# EAGLE board Project Canary V4.0 (EAGLE 8.4.1)
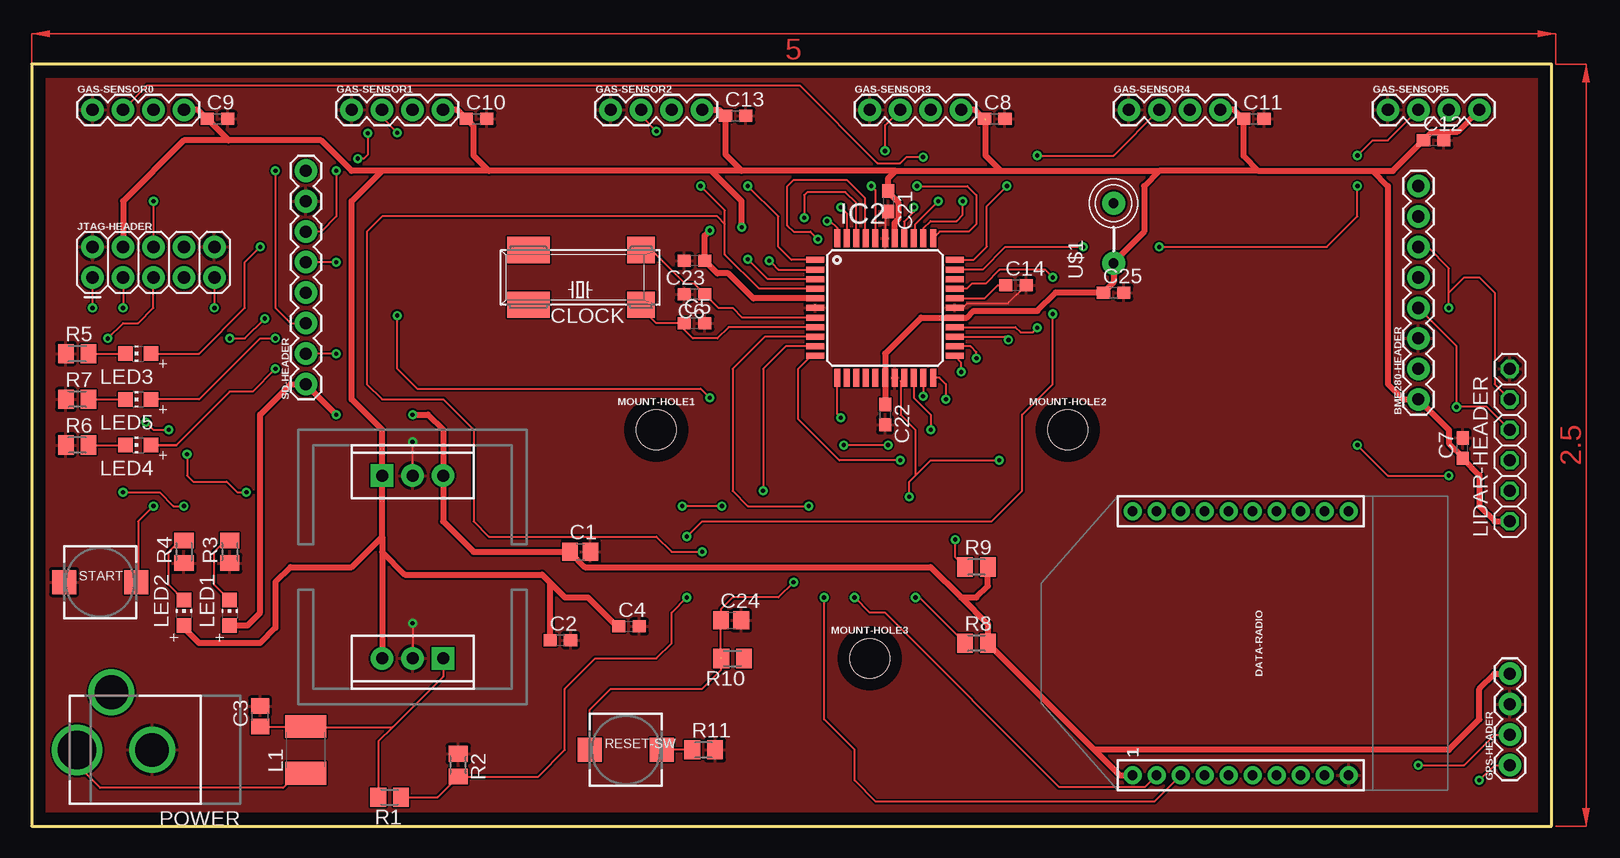
[diagram p0: board, top side]
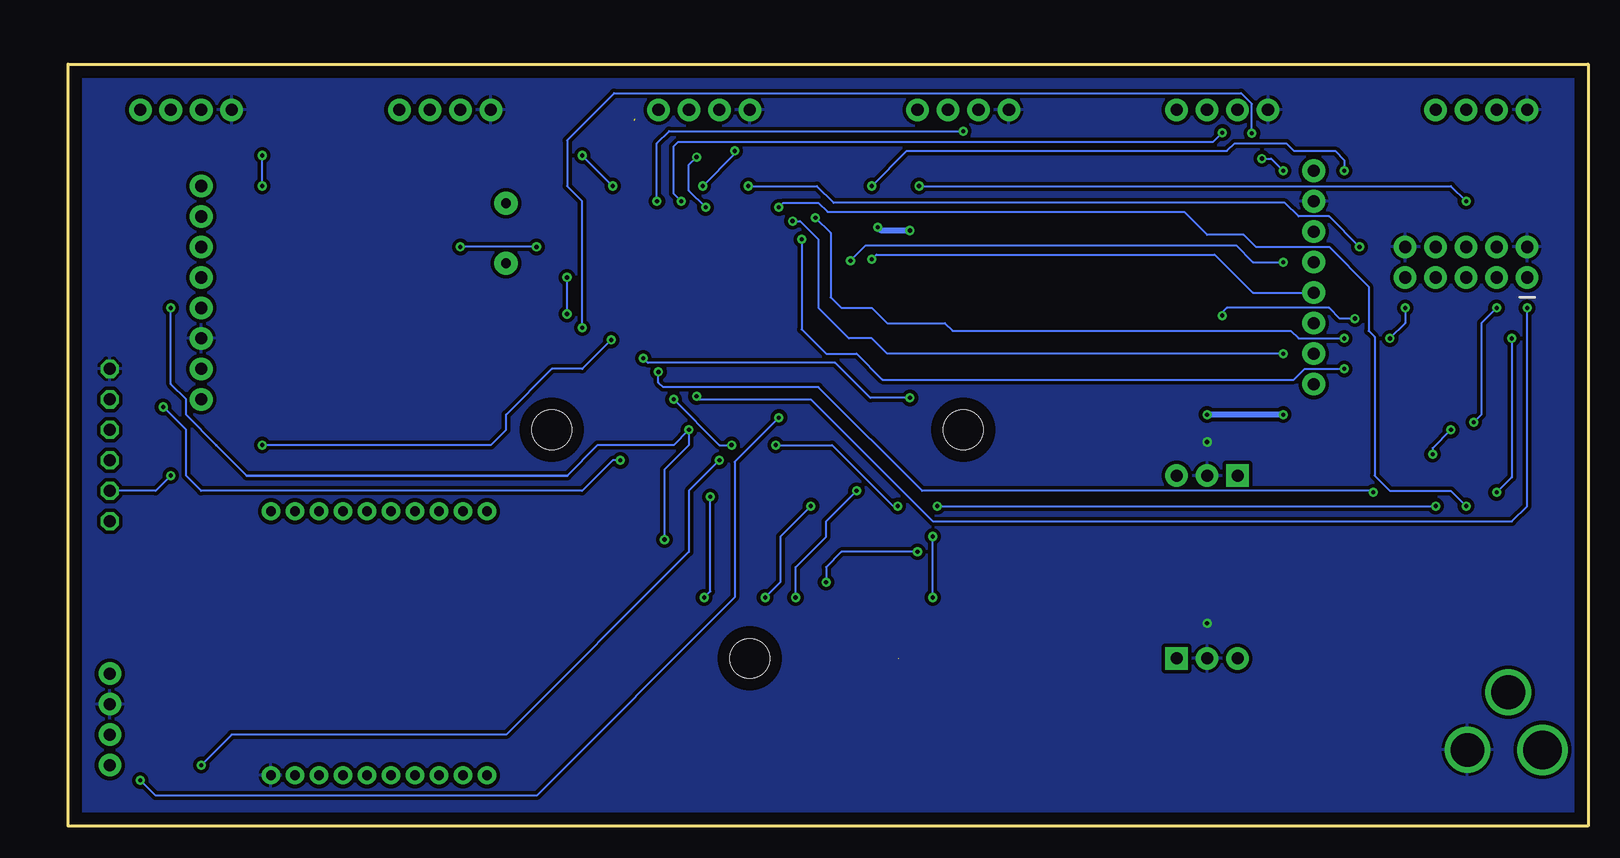
[diagram p1: board, bottom side, seen from below]

Size 126.67 x 63.49 mm. Coordinates in mm from the lower left corner, seen from the top.
Outline: 0,0 126.67,0 126.67,63.49 0,63.49 0,0
Copper layers (1*16): Top 0.035mm / dielectric 1.5mm / Bottom 0.035mm
Design rules "default": minimum track width 6mil, minimum drill 0.35mm, track to track 6mil, track to pad 6mil, pad to pad 6mil, via to via 6mil, smd to smd 6mil, copper to edge 40mil, drill to drill 6mil, minimum pad ring 10mil, minimum via ring 8mil, stop-mask expansion 4mil, vias tented up to drill 0mil, thermal gap 10mil
Net classes: 0 5V: width 0.508 mm; 1 3.3V: width 0.508 mm

## Footprints (pad centres in the part's own frame; a part is rotated, then mirrored left to right if it is on the bottom)
1X08 = drill 1.016 pad 1.88: 1 0,0; 2 2.54,0; 3 5.08,0; 4 7.62,0; 5 10.16,0; 6 12.7,0; 7 15.24,0; 8 17.78,0
C0805 = smd 1.3 x 1.5: 1 -0.85,0; 2 0.85,0
C0603 = smd 1.1 x 1: 1 -0.85,0; 2 0.85,0
86SMX = smd 2.286 x 2.184: 1 -5.08,-2.286; 4 -5.08,2.286 | smd 3.556 x 2.184: 2 4.318,-2.286; 3 4.318,2.286
XBEE = drill 0.8 pad 1.524: 1 -11,20; 2 -11,18; 3 -11,16; 4 -11,14; 5 -11,12; 6 -11,10; 7 -11,8; 8 -11,6; 9 -11,4; 10 -11,2; 11 11,2; 12 11,4; 13 11,6; 14 11,8; 15 11,10; 16 11,12; 17 11,14; 18 11,16; 19 11,18; 20 11,20
1X04 = drill 1.016 pad 1.88: 1 0,0; 2 2.54,0; 3 5.08,0; 4 7.62,0
TQFP44 = smd 1.5 x 0.5: 1 -5.8,4; 2 -5.8,3.2; 3 -5.8,2.4; 4 -5.8,1.6; 5 -5.8,0.8; 6 -5.8,0; 7 -5.8,-0.8; 8 -5.8,-1.6; 9 -5.8,-2.4; 10 -5.8,-3.2; 11 -5.8,-4; 23 5.8,-4; 24 5.8,-3.2; 25 5.8,-2.4; 26 5.8,-1.6; 27 5.8,-0.8; 28 5.8,0; 29 5.8,0.8; 30 5.8,1.6; 31 5.8,2.4; 32 5.8,3.2; 33 5.8,4 | smd 0.5 x 1.5: 12 -4,-5.8; 13 -3.2,-5.8; 14 -2.4,-5.8; 15 -1.6,-5.8; 16 -0.8,-5.8; 17 0,-5.8; 18 0.8,-5.8; 19 1.6,-5.8; 20 2.4,-5.8; 21 3.2,-5.8; 22 4,-5.8; 34 4,5.8; 35 3.2,5.8; 36 2.4,5.8; 37 1.6,5.8; 38 0.8,5.8; 39 0,5.8; 40 -0.8,5.8; 41 -1.6,5.8; 42 -2.4,5.8; 43 -3.2,5.8; 44 -4,5.8
2X5 = drill 1.016 pad 1.88: 1 0,0; 2 0,2.54; 3 2.54,0; 4 2.54,2.54; 5 5.08,0; 6 5.08,2.54; 7 7.62,0; 8 7.62,2.54; 9 10.16,0; 10 10.16,2.54
L1812 = smd 1.9 x 3.4: 1 -1.95,0; 2 1.95,0
CHIP-LED0805 = smd 1.2 x 1.2: A 0,-1.05; C 0,1.05
1X06 = drill 1.016 octagon: 1 -6.35,0; 2 -3.81,0; 3 -1.27,0; 4 1.27,0; 5 3.81,0; 6 6.35,0
STAND-OFF = hole 3.302: 0,0
DCJACK_2MM_PTH = drill 2.8: GND 0,7.35; GNDBREAK 4.8,10.75 | drill 3.2: PWR 0,13.6
M0805 = smd 1.3 x 1.6: 1 -0.95,0; 2 0.95,0
TO220-IGO = drill 1 pad 1.88: GND 0,0; OUT 2.54,0 | drill 1 pad 1.88 square: IN -2.54,0
PUSHBUTTON_SMD_SJ = smd 2 x 2: P$1 3,0; P$2 -3,0
FB = drill 0.8 pad 1.93: P$1 -2.5,0; P$2 2.5,0

## Placement (x,y rotation side)
BME280-HEADER  [1X08]  115.57,35.56 90 top
C1  1uF  [C0805]  45.72,22.86 0 top
C2  22uF  [C0603]  44.07,15.49 0 top
C3  10uF  [C0805]  19.05,9.14 90 top
C4  10uF  [C0603]  49.78,16.64 0 top
C5  22pF  [C0603]  55.24,41.91 0 top
C6  22pF  [C0603]  55.24,44.32 180 top
C7  680uF  [C0603]  119.25,31.5 90 top
C8  0.1uF  [C0603]  80.26,58.93 0 top
C9  0.1uF  [C0603]  15.49,58.93 0 top
C10  0.1uF  [C0603]  37.08,58.93 0 top
C11  0.1uF  [C0603]  101.85,58.93 0 top
C12  0.1uF  [C0603]  116.84,57.15 0 top
C13  0.1uF  [C0603]  58.67,59.18 0 top
C14  0.1uF  [C0603]  82.04,45.09 0 top
C21  100nF  [C0603]  71.37,52.07 270 top
C22  100nF  [C0603]  71.12,34.29 270 top
C23  100nF  [C0603]  55.24,47.12 180 top
C24  100nF  [C0805]  58.29,17.14 0 top
C25  0.1uF  [C0603]  90.17,44.45 0 top
CLOCK  20MHz  [86SMX]  45.72,45.72 180 top
DATA-RADIO  [XBEE]  111.76,15.24 90 top
GAS-SENSOR0  [1X04]  5.08,59.69 0 top
GAS-SENSOR1  [1X04]  26.67,59.69 0 top
GAS-SENSOR2  [1X04]  48.26,59.69 0 top
GAS-SENSOR3  [1X04]  69.85,59.69 0 top
GAS-SENSOR4  [1X04]  91.44,59.69 0 top
GAS-SENSOR5  [1X04]  113.03,59.69 0 top
GPS-HEADER  [1X04]  123.19,5.08 90 top
IC2  ATMEGA324PA  [TQFP44]  71.12,43.18 0 top
JTAG-HEADER  [2X5]  5.08,45.72 0 top
L1  10uH  [L1812]  22.86,6.35 90 top
LED1  [CHIP-LED0805]  16.51,17.78 0 top
LED2  [CHIP-LED0805]  12.7,17.78 0 top
LED3  RED  [CHIP-LED0805]  8.89,39.37 90 top
LED4  GREEN  [CHIP-LED0805]  8.89,31.75 90 top
LED5  BLUE  [CHIP-LED0805]  8.89,35.56 90 top
LIDAR-HEADER  [1X06]  123.19,31.75 90 top
MOUNT-HOLE1  STAND-OFF  [STAND-OFF]  52.07,33.02 0 top
MOUNT-HOLE2  STAND-OFF  [STAND-OFF]  86.36,33.02 0 top
MOUNT-HOLE3  STAND-OFF  [STAND-OFF]  69.85,13.97 0 top
POWER  15.5V  [DCJACK_2MM_PTH]  17.4,6.35 90 top
R1  400k +/-1%  [M0805]  29.84,2.41 180 top
R2  100k +/- 1%  [M0805]  35.56,5.08 270 top
R3  1k  [M0805]  16.51,22.86 90 top
R4  1k  [M0805]  12.7,22.86 90 top
R5  1k  [M0805]  3.81,39.37 0 top
R6  1k  [M0805]  3.81,31.75 0 top
R7  1k  [M0805]  3.81,35.56 0 top
R8  4.7k  [M0805]  78.74,15.24 0 top
R9  4.7k  [M0805]  78.74,21.59 0 top
R10  4.7K  [M0805]  58.42,13.97 180 top
R11  330  [M0805]  56.01,6.35 0 top
REGULATOR  3.3V  [TO220-IGO]  31.75,29.21 0 top
RESET-SW  [PUSHBUTTON_SMD_SJ]  49.53,6.35 0 top
SD-HEADER  [1X08]  22.86,36.83 90 top
START  [PUSHBUTTON_SMD_SJ]  5.71,20.32 0 top
SWITCHING-REGULATOR  5V  [TO220-IGO]  31.75,13.97 180 top
U$1  FB  [FB]  90.17,49.4 90 top

## Library data of the parts
BME280-HEADER SD-HEADER = SparkFun-Connectors; PROD_ID: CONN-08438
C1-C14 C21-C25 LED1-LED5 LIDAR-HEADER POWER R1-R11 RESET-SW START U$1 = adafruit
CLOCK = adafruit; OC_FARNELL: 6344860; OC_NEWARK: unknown
DATA-RADIO = SparkFun-RF
GAS-SENSOR0 GAS-SENSOR1-GAS-SENSOR5 GPS-HEADER = SparkFun-Connectors; PROD_ID: CONN-09696
IC2 = atmel; MPN: ATMEGA644PV-10AU; OC_FARNELL: 1455123; OC_NEWARK: 58M3748
JTAG-HEADER = SparkFun-Connectors; PROD_ID: CONN-08499; SF_ID: PRT-0778
L1 = eagle-ltspice; SPICEMODEL: NONE; SPICEPREFIX: L
MOUNT-HOLE1-MOUNT-HOLE3 = SparkFun-Hardware
REGULATOR SWITCHING-REGULATOR = SparkFun-IC-Power

## Nets
3.3V: C1.1 DATA-RADIO.1 GPS-HEADER.4 LED1.A R8.2 R9.2 REGULATOR.OUT SD-HEADER.1
5V: BME280-HEADER.1 C2.1 C4.1 C7.1 C8.1 C9.1 C10.1 C11.1 C12.1 C13.1 C21.1 C22.1 C23.1 C25.1 GAS-SENSOR0.4 GAS-SENSOR1.4 GAS-SENSOR2.4 GAS-SENSOR3.4 GAS-SENSOR4.4 GAS-SENSOR5.4 IC2.5 IC2.17 IC2.27 IC2.38 JTAG-HEADER.4 LED2.A LIDAR-HEADER.1 REGULATOR.IN SWITCHING-REGULATOR.OUT U$1.P$1
GND: BME280-HEADER.3 C1.2 C2.2 C3.2 C4.2 C5.2 C6.2 C7.2 C8.2 C9.2 C10.2 C11.2 C12.2 C13.2 C14.2 C21.2 C22.2 C23.2 C24.2 C25.2 DATA-RADIO.10 GAS-SENSOR0.1 GAS-SENSOR1.1 GAS-SENSOR2.1 GAS-SENSOR3.1 GAS-SENSOR4.1 GAS-SENSOR5.1 GPS-HEADER.3 IC2.6 IC2.18 IC2.28 IC2.39 JTAG-HEADER.2 JTAG-HEADER.10 LIDAR-HEADER.6 POWER.GND R2.1 R3.1 R4.1 R5.1 R6.1 R7.1 R11.2 REGULATOR.GND SD-HEADER.7 START.P$2 SWITCHING-REGULATOR.GND
GNDBREAK: POWER.GNDBREAK
N$1: C3.1 L1.2 R1.2 SWITCHING-REGULATOR.IN
N$2: LED1.C R3.2
N$3: LED2.C R4.2
N$4: LED3.C R5.2
N$5: LED4.C R6.2
N$6: LED5.C R7.2
N$7: IC2.43 START.P$1
N$8: C6.1 CLOCK.1 IC2.7
N$9: U$1.P$2
N$10: GPS-HEADER.1 IC2.12
N$11: GPS-HEADER.2 IC2.11
N$12: GAS-SENSOR0.2 IC2.37
N$13: IC2.25 LIDAR-HEADER.2
N$14: IC2.24 JTAG-HEADER.9
N$15: C14.1 IC2.29
N$16: GAS-SENSOR1.2 IC2.36
N$17: GAS-SENSOR2.2 IC2.35
N$18: GAS-SENSOR3.2 IC2.34
N$19: GAS-SENSOR4.2 IC2.33
N$20: GAS-SENSOR5.2 IC2.32
N$21: BME280-HEADER.4 IC2.19 LIDAR-HEADER.4 R8.1
N$22: L1.1 POWER.PWR
N$23: IC2.23 JTAG-HEADER.3
N$24: BME280-HEADER.6 IC2.20 LIDAR-HEADER.5 R9.1
N$25: IC2.22 JTAG-HEADER.5
N$26: DATA-RADIO.3 IC2.10
N$27: DATA-RADIO.2 IC2.9
N$28: IC2.21 JTAG-HEADER.1
N$30: R11.1 RESET-SW.P$1
N$31: R10.1
N$32: C5.1 CLOCK.4 IC2.8
RESET: C24.1 IC2.4 JTAG-HEADER.6 R10.2 RESET-SW.P$2
SD-CD: IC2.26 SD-HEADER.6
SD-CS: IC2.44 SD-HEADER.2
SD-DI: IC2.1 SD-HEADER.3
SD-DO: IC2.2 SD-HEADER.5
SD-SCK: IC2.3 SD-HEADER.4
STATUS-B: IC2.42 LED5.A
STATUS-G: IC2.41 LED4.A
STATUS-R: IC2.40 LED3.A
VOLTMETER: IC2.30 R1.1 R2.2

## Tracks (layer width: path | path; a pad name or v marks a point on that pad's centre or on a via)
3.3V  (via drill 0.35)
  Top 0.152: DATA-RADIO.1 91.87,4.24 | C1.1 44.87,22.82 | 88.65,6.35 88.61,6.32
  Top 0.508: LED1.A 18,16.73 19.05,17.78 19.05,34.29 21.59,36.83 SD-HEADER.1 v25.4,34.29 | v31.75,34.29 33.02,34.29 34.29,33.02 REGULATOR.OUT 34.29,25.4 36.83,22.86 C1.1 | 77.47,19.05 74.93,21.59 46.1,21.59 44.87,22.82 | 77.47,19.05 78.74,19.05 79.69,20 R9.2 | 77.47,19.05 79.69,16.83 R8.2 88.61,6.32 90.69,4.24 DATA-RADIO.1 | GPS-HEADER.4 121.92,12.7 120.65,11.43 120.65,8.89 118.11,6.35 88.65,6.35
  Bottom 0.508: v25.4,34.29 v31.75,34.29
5V  (via drill 0.35)  (1 unrouted)
  Top 0.152: C9.1 14.61,58.93 | 43.18,15.53 C2.1 | 119.25,30.73 C7.1 | 71.37,52.83 C21.1
  Top 0.508: 38.1,54.61 29.21,54.61 | 56.64,54.61 38.1,54.61 | 59.18,54.61 56.64,54.61 | 29.21,54.61 26.67,54.61 24.13,57.15 16.42,57.15 | 16.42,57.15 12.7,57.15 7.62,52.07 JTAG-HEADER.4 | LIDAR-HEADER.1 121.92,25.4 120.65,26.67 120.65,29.25 C7.1 | LED2.A 12.7,16.51 13.97,15.24 19.05,15.24 20.32,16.51 20.32,20.32 21.59,21.59 26.67,21.59 29.21,24.13 | 43.18,20.32 44.45,19.05 46.35,19.05 48.77,16.64 C4.1 | 72.01,54.61 59.18,54.61 | 72.01,54.61 80.77,54.61 | 80.77,54.61 93.98,54.61 | 102.23,54.61 93.98,54.61 | 102.23,54.61 111.76,54.61 | 111.76,54.61 113.45,54.61 C12.1 116.72,57.88 118.84,57.88 GAS-SENSOR5.4 | 111.76,54.61 113.03,53.34 113.03,36.83 114.3,35.56 BME280-HEADER.1 118.11,33.02 118.11,31.88 119.25,30.73 | 93.98,54.61 92.71,53.34 92.71,49.53 90.17,46.99 U$1.P$1 90.17,45.3 C25.1 85.34,44.45 83.82,42.93 78.49,42.93 77.94,42.38 IC2.27 74.13,42.38 71.12,39.37 IC2.17 C22.1 | 29.21,24.13 29.21,22.86 | 29.21,22.86 SWITCHING-REGULATOR.OUT | 29.21,24.13 REGULATOR.IN 29.21,33.02 26.67,35.56 26.67,52.07 29.21,54.61 | IC2.5 60.16,43.98 58.08,46.06 57.15,46.06 C23.1 56.09,49.21 v56.52,49.63 | GAS-SENSOR1.4 35.47,59.69 C10.1 36.83,58.33 36.83,55.88 38.1,54.61 | 59.18,54.61 57.82,55.97 C13.1 | v59.18,49.91 59.18,52.07 56.64,54.61 | 80.77,54.61 79.5,55.88 79.5,58.84 | GAS-SENSOR3.4 78.65,59.69 C8.1 | 102.23,54.61 101,55.84 C11.1 100.24,59.69 GAS-SENSOR4.4 | 16.42,57.15 C9.1 | 14.61,58.93 13.84,59.69 GAS-SENSOR0.4 | 43.18,20.32 43.18,15.53 | 43.18,20.32 42.55,20.95 31.11,20.95 29.21,22.86 | IC2.38 71.92,50.27 72.26,50.61 72.26,51.94 71.37,52.83 | 72.01,54.61 71.37,53.98 C21.1 | 57.57,59.18 C13.1
  Top 0.508: C13.1 57.32,59.69 GAS-SENSOR2.4
  Bottom 0.508: v56.52,49.63 58.9,49.63 v59.18,49.91
GND  (via drill 0.35)
  Top 0.152: REGULATOR.GND v31.75,32 | v31.75,16.89 SWITCHING-REGULATOR.GND | C21.2 71.12,50.97 IC2.39 | IC2.28 77.6,43.18 77.98,43.56 81.37,43.56 C14.2
  pour Top (isolate 0.305): 0,0 0,63.5 127,63.5 127,0
  pour Top: 0,0 127,0 127,63.5 0,63.5
  pour Bottom (isolate 0.305): 0,0 0,63.5 127,63.5 127,0
N$1
  Top 0.152: 30.1,8.26 22.91,8.26 L1.2 C3.1 | SWITCHING-REGULATOR.IN 34.29,12.45 30.1,8.26 | 30.1,8.26 28.89,7.05 R1.2
N$2
  Top 0.152: LED1.C 15.24,20.1 15.24,22.86 16.19,23.81 R3.2
N$3
  Top 0.152: LED2.C 11.43,20.1 11.43,22.86 12.38,23.81 R4.2
N$4
  Top 0.152: R5.2 LED3.C
N$5
  Top 0.152: R6.2 LED4.C
N$6
  Top 0.152: R7.2 LED5.C
N$7  (via drill 0.35)
  Top 0.152: v10.16,26.67 8.89,25.4 8.89,20.5 START.P$1 | IC2.43 67.92,51.08 v67.44,51.56
  Bottom 0.152: v10.16,26.67 11.43,27.94 16.51,27.94 17.78,29.21 17.78,40.77 18.29,41.27 18.29,44.96 21.59,48.26 27.69,48.26 28.7,49.28 31.75,49.28 33.66,51.18 63.37,51.18 64.14,51.94 67.06,51.94 v67.44,51.56
N$8
  Top 0.152: IC2.7 59.22,42.38 58.42,43.18 57.24,43.18 C6.1 55.21,45.21 54.48,45.21 51.69,48.01 CLOCK.1
N$10  (via drill 0.35)
  Top 0.152: v120.65,3.81 121.92,5.08 GPS-HEADER.1 | IC2.12 67.12,34.35 v67.44,34.04
  Bottom 0.152: v120.65,3.81 119.38,2.54 87.63,2.54 71.12,19.05 71.12,30.35 v67.44,34.04
N$11  (via drill 0.35)
  Top 0.152: v72.39,30.48 67.31,30.48 63.88,33.91 63.88,38.1 64.96,39.18 IC2.11 | v115.57,5.08 119.38,5.08 121.92,7.62 GPS-HEADER.2
  Bottom 0.152: v72.39,30.48 74.93,27.94 74.93,22.86 90.17,7.62 113.03,7.62 v115.57,5.08
N$12  (via drill 0.35)
  Top 0.152: IC2.37 72.72,50.37 73.53,51.18 v73.53,51.56 | v74.3,55.75 72.9,55.75 72.39,55.24 70.48,55.24 64.01,61.72 9.65,61.72 GAS-SENSOR0.2
  Bottom 0.152: v73.53,51.56 74.93,52.96 74.93,55.12 v74.3,55.75
N$13  (via drill 0.35)
  Top 0.152: v110.49,31.75 113.03,29.21 v118.11,29.21 | IC2.25 81.14,40.78 v81.41,40.51
  Bottom 0.152: v118.11,29.21 119.38,27.94 LIDAR-HEADER.2 | v110.49,31.75 91.44,31.75 90.17,33.02 90.17,34.29 86.36,38.1 83.82,38.1
  Bottom 0.2: v81.41,40.51 83.82,38.1
N$14  (via drill 0.35)
  Top 0.152: JTAG-HEADER.9 v15.24,43.18 | v16.51,40.64 17.78,40.64 v19.43,42.29 | v56.52,35.69 55.75,36.45 32.13,36.45 30.48,38.1 v30.48,42.55 | v78.74,38.99 78.74,39.5 78.26,39.98 IC2.24
  Bottom 0.152: v15.24,43.18 15.24,41.91 v16.51,40.64 | v19.43,42.29 20.7,42.29 21.59,43.18 30.1,43.18 30.48,42.8 v30.48,42.55 | v56.52,35.69 59.82,35.69 62.74,38.61 78.36,38.61 v78.74,38.99
N$15
  Top 0.152: IC2.29 79.41,43.98 80.52,45.09 C14.1
N$16  (via drill 0.35)
  Top 0.152: v30.48,57.78 29.21,59.05 GAS-SENSOR1.2 | IC2.36 73.66,49.12 73.66,50.16 v75.56,52.07
  Bottom 0.152: v75.56,52.07 76.2,52.7 76.2,56.64 75.82,57.02 31.24,57.02 v30.48,57.78
N$17  (via drill 0.35)
  Top 0.152: IC2.35 74.32,49.81 74.93,50.42 77.09,50.42 77.6,50.93 v77.6,52.07 | v52.07,57.91 50.8,59.18 GAS-SENSOR2.2
  Bottom 0.152: v77.6,52.07 77.6,56.9 76.58,57.91 v52.07,57.91
N$18  (via drill 0.35)
  Top 0.152: GAS-SENSOR3.2 71.12,58.42 v71.12,56.26 | v73.79,53.34 77.98,53.34 78.74,52.58 78.74,50.16 78.11,49.53 75.67,49.53 IC2.34
  Bottom 0.152: v73.79,53.34 71.12,56.01 v71.12,56.26
N$19  (via drill 0.35)
  Top 0.152: IC2.33 78.5,47.18 79.6,48.28 79.6,51.66 v81.28,53.34 | v83.82,55.88 90.17,55.88 GAS-SENSOR4.2
  Bottom 0.152: v81.28,53.34 v83.82,55.88
N$20  (via drill 0.35)
  Top 0.152: v93.98,48.26 107.95,48.26 110.49,50.8 v110.49,53.34 | v110.49,55.88 111.76,57.15 113.03,57.15 GAS-SENSOR5.2 | v87.63,48.26 81.15,48.26 79.27,46.38 IC2.32
  Bottom 0.152: v87.63,48.26 v93.98,48.26 | v110.49,53.34 v110.49,55.88
N$21  (via drill 0.35)
  Top 0.152: R8.1 73.98,19.05 v73.66,19.05 | v73.15,27.43 73.15,28.7 73.66,29.21 | 73.66,29.21 74.93,30.48 v80.64,30.48 | LIDAR-HEADER.4 121.28,34.92 v118.75,34.92 118.75,40.01 BME280-HEADER.4 | 73.66,29.21 73.66,33.02 72.42,34.26 72.42,37.08 IC2.19
  Bottom 0.152: v73.66,19.05 73.15,19.56 v73.15,27.43 | v80.64,30.48 81.28,30.48 83.82,27.94 115.57,27.94 116.84,29.21 116.84,33.02 v118.75,34.92
N$22
  Top 0.152: L1.1 22.18,4.4 20.95,3.17 5.71,3.17 3.8,5.09 POWER.PWR
N$23  (via drill 0.35)
  Top 0.152: JTAG-HEADER.3 v7.62,43.18 | v9.53,33.66 10.16,33.02 v11.43,33.02 | v12.95,30.99 12.95,29.21 13.46,28.7 16.26,28.7 17.14,27.81 v17.91,27.81 | v77.47,37.85 77.47,38.63 IC2.23
  Bottom 0.152: v7.62,43.18 8.89,41.91 8.89,34.29 v9.53,33.66 | v11.43,33.02 12.95,31.5 v12.95,30.99 | v17.91,27.81 18.03,27.94 55.5,27.94 64.14,36.58 77.09,36.58 77.47,36.96 v77.47,37.85
N$24  (via drill 0.35)
  Top 0.152: R9.1 76.96,22.42 v76.96,23.88 | v118.11,43.18 118.11,44.45 | 118.11,44.45 118.11,46.48 116.33,48.26 BME280-HEADER.6 | 118.11,44.45 119.38,45.72 120.65,45.72 121.92,44.45 121.92,36.83 LIDAR-HEADER.5 | IC2.20 73.52,35.7 74.93,34.29 v74.93,33.02
  Bottom 0.152: v76.96,23.88 76.96,29.72 74.93,31.75 v74.93,33.02 76.2,31.75 82.55,31.75 85.09,29.21 | 114.3,31.75 116.84,34.29 116.84,35.56 118.11,36.83 v118.11,43.18
  Bottom 0.2: 114.3,31.75 111.76,29.21 85.09,29.21
N$25  (via drill 0.35)
  Top 0.152: IC2.22 75.65,37.38 76.2,36.83 v76.2,35.56 | v71.37,31.75 v67.69,31.75 | v6.35,40.64 7.62,41.91 8.89,41.91 10.16,43.18 JTAG-HEADER.5 | v57.53,26.67 v54.23,26.67 | v12.7,26.67 11.81,26.67 10.67,27.81 v7.62,27.81
  Bottom 0.152: v76.2,35.56 72.39,31.75 v71.37,31.75 | v67.69,31.75 62.99,31.75 57.91,26.67 v57.53,26.67 | v54.23,26.67 v12.7,26.67 | v6.35,40.64 6.35,29.08
  Bottom 0.2: 6.35,29.08 v7.62,27.81
N$26  (via drill 0.35)
  Top 0.152: v66.04,19.05 66.04,8.89 68.58,6.35 68.58,3.81 70.36,2.03 93.55,2.03 DATA-RADIO.3 | v60.96,27.94 60.96,38.1 62.84,39.98 IC2.10
  Bottom 0.152: v66.04,19.05 66.04,21.59 63.5,24.13 63.5,25.4 v60.96,27.94
N$27  (via drill 0.35)
  Top 0.152: IC2.9 61.1,40.78 58.42,38.1 58.42,27.94 59.69,26.67 v64.77,26.67 | v68.58,19.05 69.85,17.78 71.12,17.78 85.65,3.25 92.77,3.25 DATA-RADIO.2
  Bottom 0.152: v64.77,26.67 67.31,24.13 67.31,20.32 v68.58,19.05
N$28  (via drill 0.35)
  Top 0.152: v5.08,43.18 JTAG-HEADER.1 | IC2.21 74.32,35.84 v74.3,35.81
  Bottom 0.152: v5.08,43.18 5.08,26.67 6.35,25.4 54.61,25.4 64.77,35.56 74.04,35.56 v74.3,35.81
N$30
  Top 0.152: R11.1 RESET-SW.P$1
N$32
  Top 0.152: CLOCK.4 50.8,43.18 52.07,41.91 C5.1 54.4,41.36 55.12,40.64 57.15,40.64 58.09,41.58 IC2.8
RESET  (via drill 0.35)  (1 unrouted)
  Top 0.152: IC2.4 60.63,44.78 57.78,47.62 57.78,50.16 | v10.16,52.07 JTAG-HEADER.6 | v55.88,22.86 53.34,22.86 52.07,24.13 38.1,24.13 36.83,25.4 36.83,33.02 34.29,35.56 29.21,35.56 27.94,36.83 27.94,49.53 29.21,50.8 57.15,50.8 57.78,50.16 | 57.78,50.16 57.78,51.31 v55.75,53.34 | v63.5,20.32 62.23,19.05 58.42,19.05 57.44,18.07 C24.1 57.44,14 | RESET-SW.P$2 46.53,9.7 48.26,11.43 55.88,11.43 57.47,13.02 R10.2
  Bottom 0.152: v55.88,22.86 62.23,22.86 63.5,21.59 v63.5,20.32 | v10.16,52.07 11.43,53.34 v55.75,53.34
SD-CD  (via drill 0.35)
  Top 0.152: v25.4,54.61 25.4,50.8 24.13,49.53 SD-HEADER.6 | v28.02,57.74 28.02,55.96 27.69,55.63 v27.18,55.63 | IC2.26 81.99,41.58 82.42,41.15 83.44,41.15 v83.82,41.53
  Bottom 0.152: v28.02,57.74 28.02,60.18 28.92,61.09 81.15,61.09 85.09,57.15 85.09,53.34 83.82,52.07 v83.82,41.53 | v27.18,55.63 26.42,55.63 v25.4,54.61
SD-CS  (via drill 0.35)
  Top 0.152: IC2.44 67.12,49.85 66.55,50.42 v66.29,50.42 | v25.4,39.37 SD-HEADER.2
  Bottom 0.152: v25.4,39.37 58.42,39.37 59.69,40.64 61.59,40.64 64.14,43.18 64.14,48.9 65.66,50.42 v66.29,50.42
SD-DI  (via drill 0.35)
  Top 0.152: IC2.1 63.31,47.18 62.23,48.26 62.23,50.8 v59.69,53.34 | v20.32,54.61 20.32,43.18 21.59,41.91 SD-HEADER.3
  Bottom 0.152: v59.69,53.34 56.77,56.26 30.1,56.26 29.46,56.9 25.15,56.9 24.51,56.26 21.08,56.26 20.32,55.5 v20.32,54.61
SD-DO  (via drill 0.35)
  Top 0.152: v25.4,46.99 SD-HEADER.5 | v61.47,47.12 61.72,46.89 62.23,46.38 IC2.2
  Bottom 0.152: v25.4,46.99 27.94,46.99 29.34,48.39 60.2,48.39 v61.47,47.12
SD-SCK  (via drill 0.35)
  Top 0.152: IC2.3 61.35,45.58 v59.69,47.24
  Bottom 0.152: SD-HEADER.4 27.94,44.45 31.11,47.62 59.31,47.62 v59.69,47.24
STATUS-B  (via drill 0.35)
  Top 0.152: IC2.42 68.72,51.93 67.82,52.83 64.64,52.83 64.39,52.58 v64.39,50.7 | LED5.A 13.97,35.56 16.51,38.1 19.05,40.64 v20.32,40.64
  Bottom 0.152: v20.32,40.64 24.13,40.64 24.77,41.27 52.96,41.27 53.59,41.91 58.42,41.91 59.69,43.18 62.23,43.18 63.12,44.07 63.12,49.43 v64.39,50.7
STATUS-G  (via drill 0.35)
  Top 0.152: IC2.41 69.47,49.03 69.47,52.32 67.94,53.85 63.5,53.85 62.99,53.34 62.99,50.04 63.5,49.53 64.9,49.53 v65.53,48.9 | v20.32,38.1 18.41,36.2 16.51,36.2 12.06,31.75
  Top 0.2: 12.06,31.75 LED4.A
  Bottom 0.152: v65.53,48.9 65.53,41.4 63.5,39.37 60.96,39.37 58.8,37.21 24.51,37.21 23.62,38.1 v20.32,38.1
STATUS-R  (via drill 0.35)
  Top 0.152: IC2.40 70.32,53 v69.98,53.34 | v19.05,48.26 17.78,46.99 17.78,43.18 13.97,39.37 LED3.A
  Bottom 0.152: v69.98,53.34 64.26,53.34 62.87,51.94 25.27,51.94 24.13,50.8 21.59,50.8 v19.05,48.26
VOLTMETER  (via drill 0.35)
  Top 0.152: v54.61,19.05 53.34,17.78 53.34,15.24 52.07,13.97 46.99,13.97 44.45,11.43 44.45,6.35 42.23,4.13 R2.2 33.84,2.41 R1.1 | v54.61,24.13 55.88,25.4 80.01,25.4 82.55,27.94 82.55,34.29 85.09,36.83 v85.09,42.67 | v85.09,45.72 84.45,46.35 80.64,46.35 79.5,45.21 78.36,45.21 77.93,44.78 IC2.30
  Bottom 0.152: v54.61,19.05 v54.61,24.13 | v85.09,42.67 v85.09,45.72
(copper drawn outside any net)
  shapes: Top area x2